# Altium PCB USB_Receiver.PcbDoc
Units mm, origin at the board's own origin, x right, y up, seen from the top; angles counter-clockwise.
Board outline 16.3 x 15.86 mm, 4 copper layers (Top Layer, Signal1, Signal2, Bottom Layer), stack 1.781 mm thick; 38 components, 31 nets, 141 pads, 47 vias.
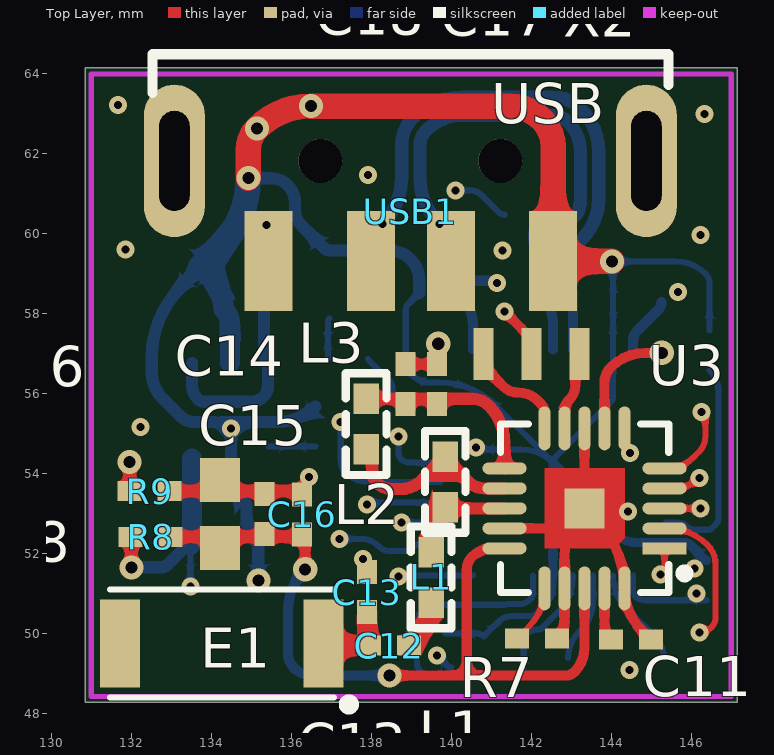
[diagram p0: Top Layer view]
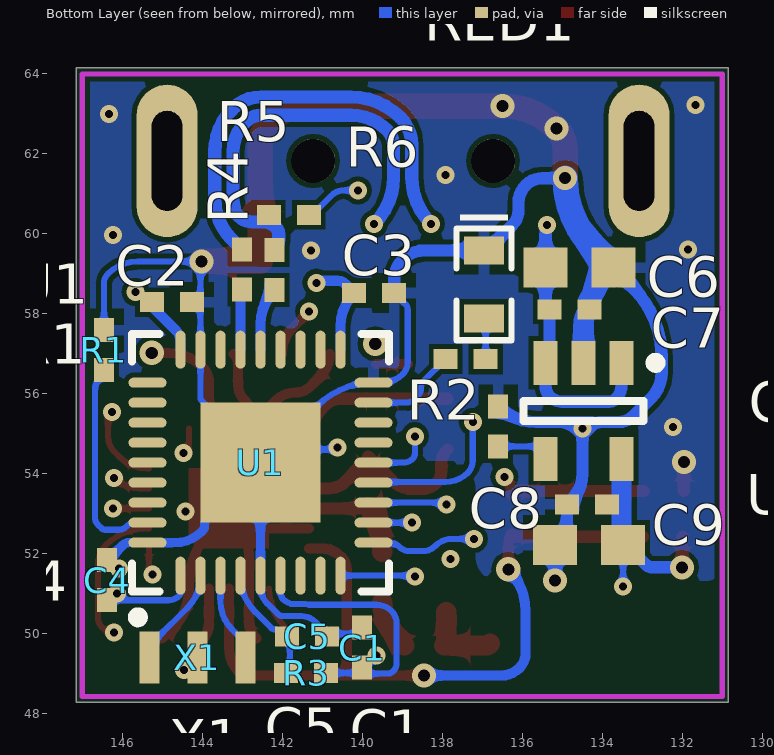
[diagram p1: Bottom Layer view, seen from below]
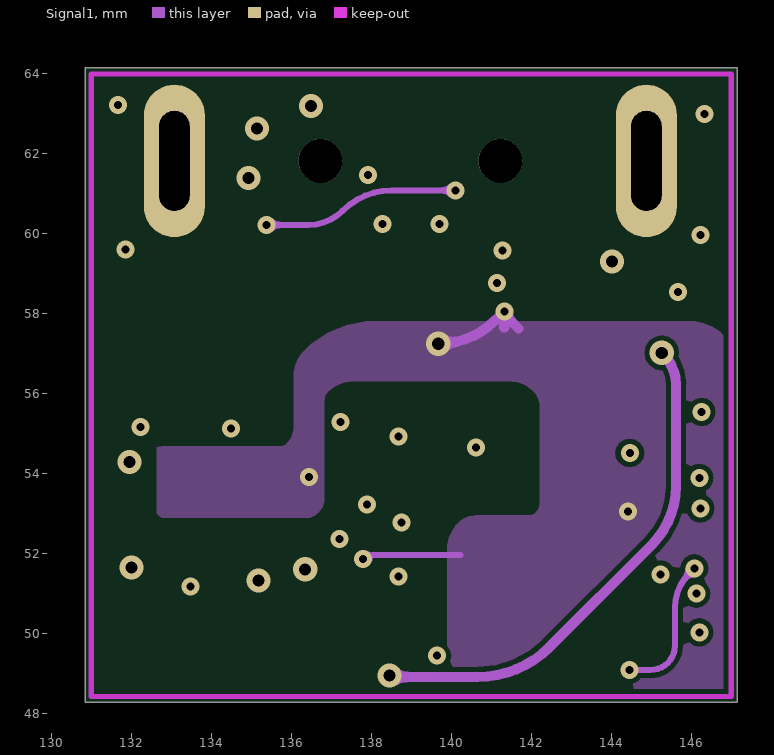
[diagram p2: Signal1]
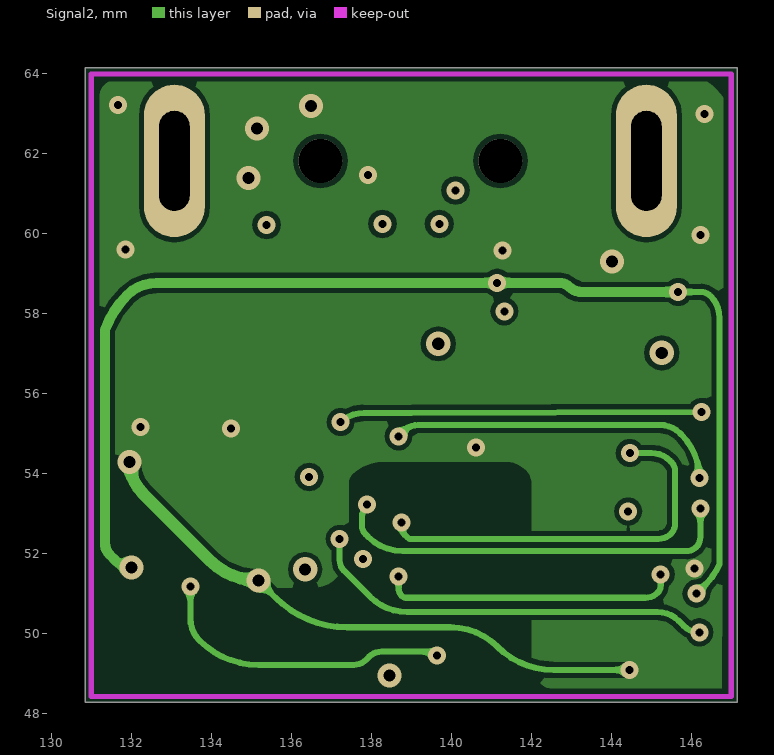
[diagram p3: Signal2]

## Layer stack, top to bottom
Top Solder: solder mask 0.0254, SM-001, Dk 4
Top Layer: signal copper 0.035
Dielectric 2: prepreg 0.0711, PP-006, Dk 4.1
Signal1: signal copper 0.035
Dielectric 1: core 1.4986, Core-043, Dk 4.3
Signal2: signal copper 0.035
Dielectric 3: prepreg 0.0711, PP-006, Dk 4.1
Bottom Layer: signal copper 0.035
Bottom Solder: solder mask 0.0254, SM-001, Dk 4

## Board outline
130.85,48.288 130.85,64.15 147.15,64.15 147.15,48.288

## Design rules (kind name [scope] priority, off if disabled: settings)
Clearance [All] p1: gap=0.127 ignorepadtopadclearanceinfootprint=FALSE
DiffPairsRouting DiffPair_DiffPairsRouting [InDifferentialPair ('USBIN')] p1: maxlimit=0.127 minlimit=0.127 mostfreqgap=0.127 toplayer_minwidth=0.33 toplayer_maxwidth=0.406 toplayer_prefwidth=0.33 midlayer1_minwidth=0.33 midlayer1_maxwidth=0.406 midlayer1_prefwidth=0.33 midlayer2_minwidth=0.33 midlayer2_maxwidth=0.406 midlayer2_prefwidth=0.33 bottomlayer_minwidth=0.33 bottomlayer_maxwidth=0.406 bottomlayer_prefwidth=0.33 maxuncoupledlength=12.7
MatchedLengths DiffPair_MatchedLengths [InDifferentialPair ('USBIN')] p1: tolerance=25.4 checknetsindiffpair=FALSE checkdiffpairvsdiffpair=TRUE checkxsignals=TRUE checkothers=TRUE
MatchedLengths [InDifferentialPair ('USB_MCU_TYPEC')] p2: tolerance=25.4 checknetsindiffpair=FALSE checkdiffpairvsdiffpair=TRUE checkxsignals=TRUE checkothers=TRUE
MinimumSolderMaskSliver [All] p1: minsoldermaskwidth=0.025
PolygonConnect [All] p1: thpad.connectstyle=Relief thpad.reliefconductorwidth=0.254 thpad.reliefentries=4 thpad.polygonreliefangle="90 Angle" thpad.airgapwidth=0.254 smdpad.connectstyle=Relief smdpad.reliefconductorwidth=0.254 smdpad.reliefentries=4 smdpad.polygonreliefangle="90 Angle" smdpad.airgapwidth=0.254 via.connectstyle=Direct via.reliefconductorwidth=0.254 via.reliefentries=4 via.polygonreliefangle="90 Angle" via.airgapwidth=0.254
RoutingVias [All] p1: holewidth=0.305 width=0.61 viastyle="Through Hole" minholewidth=0.305 minwidth=0.61 maxholewidth=0.635 maxwidth=1.27
SilkToSilkClearance [All] p1: silktosilkclearance=0.025
SilkToSolderMaskClearance [IsPad] p1: minsilkscreentomaskgap=0.025 clearancetoexposedcopper=TRUE
SolderMaskExpansion [All] p1: expansion=0.102 istentingtop=FALSE
Width [All] p1: maxlimit=1.016 minlimit=0.152 preferedwidth=0.152
26 further rules are at their usual default settings.

## Classes and differential pairs
component class POWER: C6 C7 C8 C9 C10 R4 R5 R6 U2 USB1
component class NRF24L01: C11 C12 C13 C14 C15 C16 C17 C18 E1 L1 L2 L3 R7 R8 R9 U3 X2
component class MCU: C1 C2 C3 C4 C5 R1 R2 R3 RED1 U1 X1
differential pair USBIN: +USBIN_P -USBIN_N
differential pair USB_MCU_TYPEC: +USB_MCU_TYPEC_P -USB_MCU_TYPEC_N

## Components (designator, comment, footprint, x,y, rotation, side; value= is the part's Value field where it differs from the comment)
C1 "104" Cap-0402-M 140.005,49.657 r270 bottom
C2 "104" Cap-0402-M 144.755,58.293 r0 bottom
C3 "104" Cap-0402-M 139.7,58.522 r0 bottom
C4 "104" Cap-0402-M 146.38,51.341 r270 bottom
C5 "104" Cap-0402-M 141.376,49.936 r0 bottom
C6 "10uF" Cap-0603-M 134.569,59.157 r0 bottom
C7 "104" Cap-0402-M 134.815,58.115 r0 bottom
C8 "104" Cap-0402-M 134.383,53.238 r180 bottom
C9 "10uF" Cap-0603-M 134.327,52.222 r180 bottom
C10 "10nF" Cap-0402-M 136.601,55.186 r270 bottom
C11 "33nF" CAP-0402-M 144.493,49.86 r180 top
C12 "1.5pF" Cap-0402-M 138.447,49.708 r180 top
C13 "1pF" Cap-0402-M 137.897,51.046 r270 top
C14 "10uF" Cap-0603-M 134.214,52.998 r270 top
C15 "10nF" CAP-0402-M 135.331,52.992 r270 top
C16 "1nF" CAP-0402-M 136.271,52.984 r270 top
C17 "4.7nF" Cap-0402-M 139.649,56.244 r270 top
C18 "2.2nF" Cap-0402-M 138.862,56.244 r270 top
E1 "ANT" AN2051-245 134.264,49.759 r180 top
L1 "3.9nH" L-0402 139.497,52.045 r270 top
L2 "8.2nH" L-0402 139.852,54.432 r270 top
L3 "2.7nH" L-0402 137.871,54.61 r90 top
R1 "10K" Res-0402-M 146.456,57.091 r90 bottom
R2 "4.7K" Res-0402-M 137.414,56.871 r0 bottom
R3 "10K" Res-0402-M 141.402,49.022 r180 bottom
R4 "22R" Res-0402-M 143.002,59.106 r270 bottom
R5 "22R" Res-0402-M 142.189,59.098 r270 bottom
R6 "1K5" Res-0402-M 141.834,60.477 r180 bottom
R7 "22K 1%" Res-0402-M 142.146,49.886 r180 top
R8 "0R" Res-0402-M 132.486,52.426 r0 top
R9 "0R" Res-0402-M 132.461,53.569 r0 top
RED1 "SYSTEM" LED_0603_R 136.957,58.737 r90 bottom
U1 "STM32F103T8U6" "STM-VFQFPN36_L _2" 142.545,54.28 r90 bottom locked
U2 "SPX3819" SOT23-5 134.468,55.575 r270 bottom
U3 "NRF24R01" "QFN20 4x4" 143.332,53.137 r180 top locked
USB1 "USB-A" USB_A/P_B 135.435,59.316 r180 top locked
X1 "XTAL-3P" "OSC 3213-3P" 144.12,49.403 r180 bottom
X2 "XTAL-3P" "OSC 3213-3P" 142.011,56.998 r180 top

## Footprints (in the part's own frame and the unit in brackets; to place one, negate y for a bottom-side part, rotate by r counter-clockwise, add the part's x,y. Pads: shape width x height; smd on the part's side, far side on the other; paste and mask are expansions set on the pad)
AN2051-245 [mm] "2.5G陶瓷天线"
  rect 1x2.2 smd: 0(2.54,0) 1(-2.54,0)
  silkscreen extent -3.3,-1.35 2.8,1.65, body extent -2.25,-1 2.25,1, height 0.88
Cap-0402-M [mm]
  rect 0.6x0.5 smd: 1(-0.5,0) 2(0.5,0)
  body extent -0.5,-0.25 0.5,0.25, height 0.5
CAP-0402-M [mm]
  rect 0.6x0.5 smd: 1(-0.5,0) 2(0.5,0)
  body extent -0.5,-0.25 0.5,0.25, height 0.5
Cap-0603-M [mm]
  rect 1.1x1 smd: 1(-0.85,0) 2(0.85,0)
  body extent -0.8,-0.4 0.8,0.4, height 0.6
L-0402 [mil] "小功率贴片电感"
  rect 30x25 smd: 1(0,0) 2(50,0)
  silkscreen extent -25,-20 75,20, body extent 5,-10 45,10, height 20
LED_0603_R [mm]
  rect 0.7x1 smd: 1(-0.85,0) 2(0.85,0)
  silkscreen extent -1.4,-0.69 1.75,0.69, body extent -0.8,-0.4 0.8,0.41, height 0.61
"OSC 3213-3P" [mm] "CSTCE16M0V53-R0"
  rect 0.5x1.3 smd: 1(-1.2,0) 2(0,0) 3(1.2,0)
  body extent -1.61,-0.76 1.61,0.76, height 0.91
"QFN20 4x4" [mm]
  rect 1.1x0.3 smd: 1(-2,1)
  oval 1.1x0.3 smd: 2(-2,0.5) 3(-2,0) 4(-2,-0.5) 5(-2,-1) 11(2,-1) 12(2,-0.5) 13(2,0) 14(2,0.5) 15(2,1)
  oval 0.3x1.1 smd: 6(-1,-2) 7(-0.5,-2) 8(0,-2) 9(0.5,-2) 10(1,-2) 16(1,2) 17(0.5,2) 18(0,2) 19(-0.5,2) 20(-1,2)
  rect 1x1 smd: 21(0,0)
  Top Layer region: 1,1 1,-1 -1,-1 -1,0.75 -0.75,1
  silkscreen extent -2.6,-2.11 2.11,2.11, body extent -2,-2.01 2.02,2.01, height 0.98
Res-0402-M [mm]
  rect 0.6x0.5 smd: 1(-0.5,0) 2(0.5,0)
  body extent -0.5,-0.25 0.5,0.25, height 0.38
SOT23-5 [mm]
  rect 1.1x0.6 smd: 1(-1.2,0.95) 2(-1.2,0) 3(-1.2,-0.95) 4(1.2,-0.95) 5(1.2,0.95)
  silkscreen extent -1.32,-1.5 0.25,1.92, body extent -1.4,-1.45 1.4,1.45, height 1.2
"STM-VFQFPN36_L _2" [mm] "QFN, 36-Leads, Body 6.13x6.13mm, Pitch 0.5mm, Thermal Pad 3x3mm, IPC High Density"
  oval 0.95x0.25 smd: 1(-2.825,2) 2(-2.825,1.5) 3(-2.825,1) 4(-2.825,0.5) 5(-2.825,0) 6(-2.825,-0.5) 7(-2.825,-1) 8(-2.825,-1.5) 9(-2.825,-2) 19(2.825,-2) 20(2.825,-1.5) 21(2.825,-1) 22(2.825,-0.5) 23(2.825,0) 24(2.825,0.5) 25(2.825,1) 26(2.825,1.5) 27(2.825,2)
  oval 0.25x0.95 smd: 10(-2,-2.825) 11(-1.5,-2.825) 12(-1,-2.825) 13(-0.5,-2.825) 14(0,-2.825) 15(0.5,-2.825) 16(1,-2.825) 17(1.5,-2.825) 18(2,-2.825) 28(2,2.825) 29(1.5,2.825) 30(1,2.825) 31(0.5,2.825) 32(0,2.825) 33(-0.5,2.825) 34(-1,2.825) 35(-1.5,2.825) 36(-2,2.825)
  rect 3x3 smd: 37(0,0)
  silkscreen extent -3.99,-3.21 3.21,3.21, body extent -3.07,-3.07 3.07,3.07, height 1
USB_A/P_B [mm]
  oval 1.524x3.81 hole 0.762 slot 2.5 at 90 deg: 0(-9.443,-2.508) 0(2.357,-2.508)
  round 1.1 hole 1.1 unplated: 0(-5.793,-2.508) 0(-1.293,-2.508)
  rect 1.2x2.5 smd: 1(0,0) 2(-2.556,0) 3(-4.556,0) 4(-7.112,0)
  silkscreen extent -9.99,-5.18 2.91,-4.21, body extent -9.91,-20.46 3.04,0.14, height 3.25

## Part data
C1 C2 C3 C4 C5 C6 C7 C8 C9 C10 C11 C12 C13 C14 C15 C16 C17 C18: library part CAP, "贴片陶瓷电容"
L1 L2 L3: library part INDUCTOR, "贴片电感"
R1 R2 R3 R4 R5 R6 R7 R8 R9: library part RES, "贴片电阻"
RED1: library part LED_SMD_RED, "发光二极管", Package=0603, SuppliersPartNumber=C2286, ComponentLink1Description=供应商链接, ComponentLink1URL=http://www.szlcsc.com/product/details_2659.html, Supplier=LC
U1: "ARM Cortex-M3 32-bit MCU, 64 KB Flash, 20 KB Internal RAM, 26 I/Os, 36-pin VFQFPN, -40 to 85 degC, Tray", I/Os (High Current)=26, Operating Frequency(F) (Processor speed) (MHz)=72, Supplier Part Number 1=497-11532-ND, Supply Voltage(Vcc) min (V)=2, A/D Converter="2x12-bit (10 Channel)", ComponentLink1Description="Manufacturer URL", ComponentLink1URL=http://www.st.com/web/en/home.html, ComponentLink2Description=Datasheet, ComponentLink2URL=http://www.st.com/st-web-ui/static/active/en/resource/technical/document/datasheet/CD00161566.pdf, ComponentLink3Description="Package Specification", ComponentLink3URL=http://www.st.com/st-web-ui/static/active/en/resource/technical/document/datasheet/CD00161561.pdf, Core="ARM Cortex-M3", DatasheetVersion="Rev. 16", FLASH Size (Prog) (kB)=64, Internal RAM Size (kB)=20, Mounting Technology="Surface Mount", PackageDescription="36-Pin Quad Flat No-Lead, 6 x 6 x 1.0 mm Body, 0.5 mm Pitch, Exposed Pad", PackageReference=VFQFPN36, PackageVersion="Rev. 16, 08/2013", Packing=Tray, PartNumber=STM32F103T8U6, Supplier 1=Digi-Key, Supplier 2=Farnell, Supplier 3=Newark, Supplier 4=Mouser, Supplier Part Number 2=1606329, Supplier Part Number 3=11N8298, Supplier Part Number 4=511-STM32F103T8U6
U3: "2.4G无线"
X1 X2: "3脚无源晶振带电容"
E1: PackageReference=R_1206, Published=12-August-2017, Publisher=mazhongwei

## Via types
v1: diameter 0.45, hole 0.2, Top Layer to Bottom Layer, tented both sides, 36 vias
v2: diameter 0.6, hole 0.3, Top Layer to Bottom Layer, tented both sides, 7 vias
v3: diameter 0.61, hole 0.305, Top Layer to Bottom Layer, tented both sides, 4 vias

## Nets (pads, with @x,y where several pads share a name; then routed paths per layer and width w, separated by ;. In a path a pad name is that pad's centre, name@x,y a point inside that pad or via, vN(x,y) a via of type N, cw(c..) or ccw(c..) an arc to the next point about the centre after c; other vN are vias at no path point)
3V3: C1.2 C2.2 C3.2 C4.2 C8.2 C9.2 R3.2 R8.1 U1.1 U1.6 U1.19 U1.27 U2.5 | length 56.5
  Top Layer w0.305: R8.1 cw(c131.944,52.384) 132.004,52.384 v2(132.004,51.664)
  Signal2 w0.152: v1(133.477,51.181) 133.477,50.387 ccw(c134.257,50.387) 133.706,49.835 ccw(c135.177,51.307) 135.177,49.225 137.566,49.225 ccw(c137.566,49.654) 137.87,49.351 137.947,49.428 cw(c138.254,49.122) 138.254,49.555 139.501,49.555 cw(c139.501,49.444) 139.58,49.523 v1(139.649,49.454) ; v1(145.669,58.547) 146.237,58.547 cw(c146.237,58.2) 146.482,58.445 cw(c145.936,57.9) 146.708,57.9 146.708,51.755 cw(c145.34,52.299) 146.381,51.258 v1(146.126,51.003)
  Signal2 w0.254: v2(132.004,51.664) cw(c132.004,52.215) 131.614,51.825 131.468,51.971 cw(c131.771,52.273) 131.343,52.273 131.343,57.599 cw(c133.619,56.754) 131.902,58.471 cw(c132.638,57.735) 132.638,58.776 v1(141.148,58.776) 142.706,58.776 cw(c142.706,58.429) 142.951,58.674 ccw(c143.258,58.981) 143.258,58.547 v1(145.669,58.547)
  Bottom Layer w0.152: v1(133.477,51.181) C9.2 ; v1(139.649,49.454) 139.905,49.198 ccw(c140.005,49.298) C1.2 ; R3.2@140.808,49.022 139.895,49.022 ccw(c139.895,48.962) 139.852,49.005 139.382,49.005 cw(c139.382,49.238) 139.217,49.073 cw(c139.401,49.257) 139.141,49.257 139.141,50.265 cw(c139.575,50.265) 139.268,50.571 cw(c139.643,50.196) 139.643,50.727 141.325,50.727 cw(c141.516,49.924) 141.516,50.749 141.779,50.749 ccw(c141.618,51.244) 141.986,50.876 ccw(c141.844,51.018) 142.045,51.018 U1.6 ; U1.1 144.545,51.03 ccw(c144.654,51.03) 144.577,50.952 ccw(c144.845,51.22) 144.845,50.841 C4.2
  Bottom Layer w0.254: U1.19 140.545,57.689 ccw(c139.368,57.689) C3.2 140.428,58.749 cw(c140.614,58.562) 140.614,58.826 141.025,58.826 cw(c141.025,58.653) v1(141.148,58.776) ; U1.27 144.545,57.321 cw(c144.914,57.321) 144.653,57.582 145.177,58.106 ccw(c144.99,58.293) C2.2
  Bottom Layer w0.305: v2(132.004,51.664) 132.734,51.664 ccw(c132.734,51.924) 132.918,51.74 133.347,52.169 cw(c133.477,52.038) C9.2
  Bottom Layer w0.508: C9.2 ccw(c133.379,52.32) 133.518,52.32 U2.5
5V: C6.2 C7.2 R6.2 U2.1 U2.3 USB1.1 | length 13.4
  Signal1 w0.152: v1(135.382,60.223) 136.429,60.223 ccw(c136.429,61.437) 137.287,60.579 cw(c138.513,59.353) 138.513,61.087 v1(140.106,61.087)
  Bottom Layer w0.152: v1(140.106,61.087) 140.46,61.087 cw(c140.46,60.653) 140.767,60.96 141.19,60.537 ccw(c141.334,60.681) R6.2
  Bottom Layer w0.305: U2.1 133.518,56.211 ccw(c133.986,56.211) 133.655,55.88 ccw(c133.839,56.064) 133.839,55.804 134.999,55.804 ccw(c134.999,56.237) 135.306,55.931 ccw(c135.036,56.201) 135.418,56.201 U2.3 cw(c135.665,57.022) 135.315,57.022 C7.2 ccw(c135.064,58.366) 135.419,58.366 C6.2 135.419,60.134 ccw(c135.292,60.134) v1(135.382,60.223)
GND: C1.1 C2.1 C3.1 C4.1 C5.1 C6.1 C7.1 C8.1 C9.1 C10.1 R1.2 R9.1 RED1.2 U1.5 U1.18 U1.26 U1.36 U1.37 U2.2 USB1.4 X1.2 | length 86.4
  Top Layer w0.305: R9.1 v2(131.961,54.297)
  Top Layer w0.635: v2(134.925,61.392) 134.925,62.106 cw(c135.679,62.106) v2(135.146,62.639) cw(c136.489,61.296) v2(136.489,63.195) 141.468,63.195 cw(c141.468,62.068) 142.265,62.865 cw(c141.585,62.184) 142.547,62.184 USB1.4 144.011,59.316 v2(144.018,59.309)
  Signal1 w0.152: v1(144.45,49.098) 144.986,49.098 ccw(c144.986,49.705) 145.415,49.276 ccw(c144.986,49.705) 145.593,49.705 145.593,50.648 cw(c146.819,50.648) 145.952,51.515 v1(146.075,51.638)
  Signal2 w0.152: v2(135.179,51.333) 135.603,50.909 ccw(c137.399,52.705) 137.399,50.165 139.983,50.165 cw(c139.983,48.517) 141.148,49.682 ccw(c142.558,51.093) 142.558,49.098 v1(144.45,49.098)
  Signal2 w0.305: v2(131.961,54.297) ccw(c133.065,54.297) 132.284,53.517 133.965,51.836 ccw(c135.179,53.05) v2(135.179,51.333)
  Bottom Layer w0.152: C3.1 138.917,58.239 ccw(c139.051,58.105) 138.862,58.105 138.862,56.796 ccw(c139.295,56.796) 138.989,56.49 ccw(c139.495,56.996) 139.495,56.28 U1.18 cw(c139.72,54.288) 141.128,55.696 U1.37 ; C1.1@139.852,50.005 140.653,50.005 cw(c140.653,49.772) 140.818,49.936 141.191,50.31 cw(c141.516,49.985) 141.516,50.444 141.986,50.444 ccw(c141.986,50.628) 142.116,50.498 142.367,50.749 ccw(c141.938,51.178) 142.545,51.178 U1.5 ; v1@140.589,54.61 141.748,54.61 cw(c141.748,53.483) U1.37 ; v2(144.018,59.309) v2@144.045,59.309 ; R1.2 146.456,58.759 ccw(c146.11,58.759) 146.355,59.004 ccw(c145.619,58.268) 145.619,59.309 v2@144.045,59.309 ; U1.37 cw(c142.729,54.28) 142.599,54.41 143.993,55.804 ccw(c143.867,55.93) 144.045,55.93 U1.26 v2@144.045,59.309
  Bottom Layer w0.229: U1.5 U1.37 143.816,53.008 cw(c143.513,52.705) 143.942,52.705 ccw(c144.126,52.705) 143.996,52.575 144.018,52.553 ccw(c144.677,53.211) 144.677,52.28 U1.36 145.835,52.28 cw(c145.835,52.084) 145.974,52.222 146.337,51.859 ccw(c146.38,51.903) C4.1
  Bottom Layer w0.305: C6.1 133.256,58.693 ccw(c135.052,56.897) 132.512,56.897 132.512,56.54 ccw(c133.432,56.54) 132.781,55.89 133.232,55.439 ccw(c133.579,55.786) 133.579,55.296 134.036,55.296 cw(c134.036,54.989) 134.253,55.206 v1@134.493,54.966 ; 134.253,55.296 v1@134.493,55.296 ; v2(134.925,61.392) 135.486,61.392 cw(c135.486,60.785) 135.915,61.214 cw(c135.486,60.785) 136.093,60.785 136.093,60.591 ccw(c136.614,60.591) 136.246,60.223 136.83,59.639 ccw(c136.957,59.766) RED1.2 138.441,59.587 cw(c138.441,58.812) 138.989,59.36 cw(c138.479,58.85) 139.2,58.85 C3.1 ; v2(135.179,51.333) 135.177,51.335 C9.1 cw(c135.886,52.931) 134.883,52.931 C8.1 134.756,53.366 cw(c135.39,54) 134.493,54 v1@134.493,54.966 ; C10.1 cw(c135.659,56.629) 135.659,55.296 135.076,55.296 ; v1@134.493,54.966 v1@134.493,55.296 ; v1@134.493,54.966 134.645,55.117 cw(c135.076,54.686) 135.076,55.296 ; v1@134.493,55.296 135.076,55.296
  Bottom Layer w0.508: C6.1 134,58.876 cw(c133.24,58.115) C7.1 cw(c133.947,57.747) 134.468,57.747 U2.2
  Bottom Layer w0.635: C6.1 134.197,59.634 ccw(c132.439,61.392) v2(134.925,61.392)
  other v1: 140.614,54.661 134.493,55.131 132.232,55.169 141.28,59.584 131.851,59.614 146.228,59.969 137.922,61.468 146.329,62.992 131.674,63.221
GPIO_CE_MCU_NRF: U1.9 U3.1 | length 10
  Top Layer w0.152: v1(145.237,51.486) ccw(c145.008,51.715) 145.332,51.715 U3.1
  Signal2 w0.152: v1(138.684,51.435) 138.684,51.136 ccw(c138.944,51.136) 138.76,50.952 ccw(c138.883,51.075) 138.883,50.902 144.854,50.902 ccw(c144.854,51.335) 145.161,51.029 ccw(c144.977,51.213) 145.237,51.213 v1(145.237,51.486)
  Bottom Layer w0.152: v1(138.684,51.435) cw(c138.732,51.387) 138.732,51.455 U1.9
GPIO_IRQ_NRF_MCU: U1.11 U3.6 | length 11.7
  Top Layer w0.152: U3.6 144.332,54.836 ccw(c144.777,54.836) v1(144.462,54.521)
  Signal2 w0.152: v1@138.702,52.838 v1(138.76,52.78) 138.76,52.66 ccw(c139.02,52.66) 138.836,52.476 ccw(c139.511,53.151) 138.956,52.375 145.185,52.375 ccw(c145.185,52.808) 145.491,52.502 ccw(c145.246,52.747) 145.593,52.747 145.593,54.077 ccw(c145.286,54.077) 145.503,54.293 145.466,54.331 ccw(c145.006,53.871) 145.006,54.521 v1(144.462,54.521)
  Bottom Layer w0.152: v1(138.76,52.78) U1.11
GPIO_MCU_LED: R2.2 U1.17 | length 2.4
  Bottom Layer w0.152: R2.2 138.447,56.337 cw(c138.244,56.134) 138.532,56.134 ccw(c138.777,56.134) 138.603,55.961 138.709,55.855 ccw(c138.89,56.035) 138.89,55.78 U1.17
NetC10_2: C10.2 U2.4 | length 1.2
  Bottom Layer w0.152: U2.4@135.433,54.686 C10.2
NetC11_2: C11.2 U3.19 | length 1.3
  Top Layer w0.254: U3.19 143.832,50.247 ccw(c144.38,50.247) C11.2
NetC12_1: C12.1 L1.2 | length 1.2
  Top Layer w0.508: C12.1 139.131,49.891 ccw(c138.248,50.775) L1.2
NetC12_2: C12.2 C13.2 E1.1 | length 2
  Top Layer w0.508: E1.1 ccw(c136.927,49.881) 136.927,49.708 C12.2 cw(c138.07,49.83) 137.897,49.83 C13.2
NetC17_2: C17.2 C18.2 L3.2 U3.11 | length 4.8
  Top Layer w0.305: L3.2 138.862,55.88 139.649,55.88 140.515,55.88 cw(c140.515,55.273) 140.945,55.702 cw(c140.009,54.766) 141.332,54.766 U3.11
NetL1_1: L1.1 L2.2 U3.13 | length 2.7
  Top Layer w0.305: L2.2 ccw(c139.914,53.224) 139.914,53.137 U3.13
  Top Layer w0.508: L1.1 139.497,52.304 cw(c140.711,52.304) L2.2
NetL2_1: L2.1 L3.1 U3.12 | length 6
  Top Layer w0.305: L3.1 cw(c137.503,54.242) 138.024,54.242 138.024,54.051 ccw(c138.392,54.051) 138.131,53.791 138.151,53.772 ccw(c138.519,54.14) 138.519,53.619 138.735,53.619 ccw(c138.735,54.355) 139.255,53.835 ; U3.12 140.824,53.637 cw(c140.824,54.184) 140.437,53.797 ; 139.256,53.835 cw(c139.532,53.558) 139.532,53.95 140.069,53.95 cw(c140.069,53.429) 140.437,53.797 ; 139.256,53.835 L2.1 ccw(c139.975,54.432) 139.888,54.345 140.437,53.797
NetR1_1: R1.1 U1.35 | length 5.3
  Bottom Layer w0.152: U1.35 145.656,52.78 cw(c145.656,52.438) 145.898,52.68 ccw(c146.082,52.864) 146.082,52.603 146.431,52.603 ccw(c146.431,52.726) 146.518,52.639 146.609,52.73 ccw(c146.425,52.914) 146.685,52.914 146.685,56.039 ccw(c145.905,56.039) R1.1
NetR2_1: R2.1 RED1.1 | length 1
  Bottom Layer w0.152: R2.1 136.914,57.783 cw(c137.06,57.783) RED1.1
NetR7_2: R7.2 U3.16 | length 1.5
  Top Layer w0.152: R7.2 141.932,50.172 ccw(c140.967,51.137) U3.16
NetU3_9: U3.9 X2.1 | length 2
  Top Layer w0.254: U3.9 142.832,55.567 cw(c143.238,55.567) 142.951,55.855 ccw(c142.583,56.223) 143.104,56.223 143.104,56.737 cw(c143.472,56.737) X2.1
NetU3_10: U3.10 X2.3 | length 2.7
  Top Layer w0.254: X2.3 ccw(c141.594,56.998) 141.041,56.444 141.3,56.185 ccw(c141.668,56.553) 141.668,56.032 141.681,56.032 cw(c141.681,55.358) 142.158,55.835 142.24,55.753 cw(c142.017,55.53) 142.332,55.53 U3.10
NRST_MCU_KEY: C5.2 R3.1 U1.4 | length 3
  Bottom Layer w0.152: R3.1@141.808,49.022 141.808,49.927 141.818,49.936 141.858,49.977 cw(c142.189,49.646) 142.189,50.114 ccw(c142.189,50.237) 142.276,50.15 142.666,50.54 ccw(c141.751,51.455) U1.4
OSC_MCU_XTAL: U1.3 X1.3 | length 2.2
  Bottom Layer w0.152: X1.3 cw(c143.824,49.403) 143.185,50.043 143.256,50.114 ccw(c142.559,50.811) 143.545,50.811 U1.3
OSC_XTAL_MCU: U1.2 X1.1 | length 2.5
  Bottom Layer w0.152: U1.2 144.045,51.452 ccw(c145.193,51.452) 144.381,50.64 145.109,49.913 cw(c144.599,49.403) X1.1
RF_3V3: C14.2 C15.2 C16.2 R8.2 U3.7 U3.15 U3.18 | length 35.8
  Top Layer w0.254: C16.2 cw(c136.087,52.301) 136.347,52.301 v3(136.347,51.613) ; v3(138.455,48.959) 140.386,48.959 ; U3.15 141.042,52.137 ccw(c141.042,51.388) 140.513,51.918 ccw(c140.819,51.611) 140.386,51.611 140.386,48.959 ; U3.18 143.332,49.661 cw(c142.465,49.661) 143.078,49.047 cw(c142.864,49.262) 142.864,48.959 140.386,48.959 ; U3.7 143.832,56.28 cw(c144.38,56.28) 143.993,56.667 cw(c144.851,55.809) 144.851,57.023 v3(145.263,57.023)
  Top Layer w0.305: R8.2 136.129,52.426 ccw(c136.129,52.626) C16.2
  Signal1 w0.254: v3(138.455,48.959) 138.455,48.92 140.654,48.92 ccw(c140.654,51.46) 142.451,49.664 145.009,52.222 ccw(c143.537,53.694) 145.618,53.694 145.618,56.236 ccw(c144.576,56.236) 145.313,56.973 v3(145.263,57.023)
  Bottom Layer w0.254: v3(136.347,51.613) ccw(c137.39,50.57) 135.915,50.57 135.915,49.517 ccw(c136.436,49.517) 136.068,49.149 ccw(c136.528,49.609) 136.528,48.959 v3(138.455,48.959)
RF_GND: C11.1 C13.1 C14.1 C15.1 C16.1 C17.1 C18.1 R7.1 R9.2 U3.8 U3.14 U3.17 U3.20 U3.21 X2.2 | length 21.5
  Top Layer w0.254: C16.1 136.271,53.495 cw(c136.878,53.495) v1(136.449,53.924) ; C18.1 C17.1 ; v1(141.326,58.064) 141.742,57.648 cw(c141.092,56.998) X2.2 ; U3.14 142.748,52.637 cw(c142.748,52.349) 142.95,52.554 ; R7.1 ccw(c142.198,50.334) 142.832,50.334 U3.17 142.832,51.93 cw(c144.539,51.93) 142.95,52.554 ; 142.951,52.553 ccw(c142.748,52.349) 142.95,52.554 ; 143.332,53.746 U3.8 ; C11.1@145.011,49.888 cw(c145.82,51.137) U3.20 ccw(c141.918,51.137) 143.625,52.844 U3.21 ccw(c144.539,51.93) 142.95,52.554
  Top Layer w0.305: R9.2 136.094,53.569 cw(c136.094,53.318) C16.1@136.271,53.495
  Signal1 w0.152: v1(137.795,51.867) cw(c138.04,51.622) 138.04,51.968 140.233,51.968
  Signal1 w0.254: v3(139.675,57.252) ccw(c139.675,59.275) 141.105,57.844 v1(141.326,58.064) ; 141.326,57.658 v1(141.326,58.064) ; 141.681,57.633 141.379,57.934 cw(c141.51,58.064) v1(141.326,58.064)
  other v1: 144.424,53.061
SPI_CSN_MCU_NRF: U1.10 U3.2 | length 16.6
  Top Layer w0.152: U3.2 145.405,52.637 cw(c145.405,51.222) 146.406,52.222 cw(c145.915,51.732) 146.609,51.732 146.609,50.41 cw(c146.262,50.41) 146.507,50.165 146.506,50.164 cw(c146.202,50.467) v1(146.202,50.038) 146.11,50.038 v1@146.101,50.047
  Signal2 w0.152: v1(137.211,52.375) 137.211,51.833 ccw(c137.558,51.833) 137.312,51.587 137.97,50.93 ccw(c138.897,51.857) 138.897,50.546 145.157,50.546 cw(c145.157,49.801) 145.684,50.328 145.812,50.2 ccw(c146.202,50.59) v1(146.202,50.038)
  Bottom Layer w0.152: v1(137.211,52.375) 137.747,52.375 cw(c137.747,51.768) 138.176,52.197 138.177,52.196 ccw(c138.481,52.499) 138.481,52.07 138.82,52.07 ccw(c138.82,52.417) 139.065,52.172 cw(c139.326,51.91) 139.326,52.28 U1.10
SPI_MISO_NRF_MCU: U1.13 U3.5 | length 15
  Top Layer w0.152: U3.5 145.398,54.137 ccw(c145.398,55.059) 146.05,54.407 146.193,54.55 ccw(c145.803,54.94) 146.355,54.94 146.355,55.407 ccw(c146.202,55.407) v1(146.256,55.55)
  Signal2 w0.152: v1@137.279,55.339 v1(137.236,55.296) 137.216,55.275 cw(c137.817,54.674) 137.817,55.524 138.999,55.524 v1(146.256,55.55)
  Bottom Layer w0.152: v1(137.236,55.296) 137.236,54.332 ccw(c137.67,54.332) 137.363,54.026 ccw(c137.915,54.578) 137.915,53.797 139.702,53.797 U1.13
SPI_MOSI_MCU_NRF: U1.14 U3.4 | length 11
  Top Layer w0.152: U3.4 145.57,53.637 ccw(c145.57,54.531) v1(146.202,53.899)
  Signal2 w0.152: v1(138.684,54.94) 138.82,55.076 cw(c139.167,54.729) 139.167,55.22 140.106,55.223 145.22,55.223 cw(c145.22,54.516) 145.72,55.016 145.753,54.983 cw(c144.669,53.899) v1(146.202,53.899)
  Bottom Layer w0.152: v1(138.684,54.94) 138.684,54.504 ccw(c138.857,54.504) 138.735,54.381 ccw(c138.98,54.627) 138.98,54.28 U1.14 U1.14@139.771,54.28
SPI_SCK_MCU_NRF: U1.12 U3.3 | length 13.3
  Top Layer w0.152: U3.3 146.11,53.137 cw(c146.11,52.79) 146.355,53.035 146.253,53.137 v1(146.228,53.137)
  Signal2 w0.152: v1(137.897,53.238) ccw(c138.203,52.932) 137.77,52.932 137.77,52.705 ccw(c138.076,52.705) 137.859,52.488 137.922,52.426 ccw(c138.78,53.284) 138.78,52.07 145.881,52.07 ccw(c145.881,52.417) 146.126,52.172 ccw(c145.881,52.417) 146.228,52.417 v1(146.228,53.137)
  Bottom Layer w0.152: v1(137.897,53.238) cw(c137.997,53.138) 137.997,53.28 U1.12
USB_MCU_TYPEC_N: R5.2 U1.23 | length 1.6
  Bottom Layer w0.254: R5.2 cw(c141.331,57.739) 142.545,57.739 U1.23
USB_MCU_TYPEC_P: R4.2 U1.24 | length 1.5
  Bottom Layer w0.254: R4.2 143.045,58.563 U1.24
USBIN_N: R5.1 R6.1 USB1.3 | length 10.3
  Bottom Layer w0.33: v1(139.7,60.249) cw(c140.865,61.414) 139.217,61.414 139.217,62.218 cw(c139.738,62.218) 139.37,62.586 cw(c140.29,61.666) 140.29,62.967 142.532,62.967 cw(c142.532,62.446) 142.9,62.814 142.925,62.789 cw(c142.188,62.052) 143.231,62.052 143.231,60.884 cw(c142.258,60.884) 143.157,60.512 143.083,60.438 cw(c142.748,60.773) 142.748,60.3 142.47,60.3 ccw(c142.47,59.866) 142.164,60.173 ccw(c142.348,59.989) 142.088,59.989 142.088,59.843 ccw(c142.434,59.843) R5.1
USBIN_P: R4.1 USB1.2 | length 11.1
  Bottom Layer w0.33: v1(138.278,60.249) ccw(c137.112,61.414) 138.76,61.414 138.76,62.219 cw(c139.734,62.219) 139.045,62.908 139.047,62.91 cw(c140.288,61.669) 140.288,63.424 142.534,63.424 cw(c142.534,62.451) 143.222,63.139 143.249,63.112 cw(c142.19,62.053) 143.688,62.053 143.688,60.884 cw(c142.258,60.884) 143.269,59.873 R4.1
pads on no net: E1.0 U1.7 U1.8 U1.15 U1.16 U1.20 U1.21 U1.22 U1.25 U1.28 U1.29 U1.30 U1.31 U1.32 U1.33 U1.34 USB1.0

## Polygon pours and split planes (outlines as drawn)
no net on Top Layer "NONET_L01_P005" (solid, pour order 5): 147,64
RF_GND on Signal1 "RF_GND_L02_P000" (solid, remove dead copper, pour order 0): 147,48.438 ccw(c146.939,48.377) 146.938,48.463 140.233,48.463 cw(c140.233,48.708) 140.06,48.535 139.954,48.641 cw(c140.077,48.764) 139.903,48.764 139.903,52.107 cw(c140.857,52.107) 140.183,52.781 cw(c140.612,52.352) 140.612,52.959 141.929,52.959 ccw(c141.929,53.219) 142.113,53.035 ccw(c141.868,53.28) 142.215,53.28 142.215,55.69 ccw(c141.695,55.69) 142.062,56.058 ccw(c141.449,55.445) 141.449,56.312 137.558,56.312 ccw(c137.558,55.405) 136.917,56.046 ccw(c137.126,55.836) 136.83,55.836 136.83,53.391 cw(c136.34,53.391) 136.686,53.044 136.601,52.959 cw(c136.479,53.081) 136.479,52.908 132.74,52.908 cw(c132.69,54.523) 132.639,52.908 132.639,54.661 cw(c132.957,53.397) 132.766,54.686 135.706,54.686 ccw(c135.706,54.946) 135.89,54.762 ccw(c135.461,55.192) 136.068,55.192 136.068,56.461 cw(c136.935,56.461) 136.322,57.074 cw(c138.105,55.29) 138.106,57.813 145.984,57.813 cw(c145.984,56.678) 146.787,57.48 cw(c146.236,56.929) 147.015,56.928 147.015,56.871
GND on Signal2 "GND_L03_P004" (solid, remove dead copper, pour order 4): 146.761,48.641 142.494,48.641 cw(c142.494,49.009) 142.234,48.749 142.088,48.895 cw(c142.272,49.079) 142.011,49.079 142.011,53.77 ccw(c141.578,53.77) 141.884,54.077 ccw(c141.333,53.525) 141.333,54.305 138.313,54.305 ccw(c138.313,53.178) 137.516,53.975 ccw(c137.7,53.791) 137.439,53.791 137.439,52.181 cw(c136.312,52.181) 137.109,51.384 cw(c136.557,51.936) 136.557,51.156 131.851,51.156 cw(c131.851,51.707) 131.461,51.317 131.293,51.486 cw(c131.495,51.688) 131.209,51.688 131.209,63.448 cw(c131.562,63.448) 131.312,63.698 131.343,63.729 cw(c131.711,63.361) 131.711,63.881 146.103,63.881 cw(c146.103,63.274) 146.533,63.703 146.701,63.535 cw(c146.311,63.144) 146.863,63.144
GND on Bottom Layer "GND_L04_P006" (solid, pour order 6): 147,64 131,64 131,51.809 ccw(c131.565,51.809) 131.166,51.41 ccw(c131.35,51.594) 131.35,51.333 136.65,51.333 ccw(c136.65,51.767) 136.957,51.46 ccw(c136.466,51.951) 137.16,51.951 137.16,53.67 cw(c137.405,53.67) 137.232,53.844 137.668,54.28 cw(c137.791,54.157) 137.791,54.331 145.657,54.331 ccw(c145.657,55.892) 146.761,54.788

## Keep-outs
Keep-Out Layer:
  lines w0.127: 131,48.438 147,48.438 147,64 131,64 131,48.438

## Silkscreen, mask and mechanical layers (free items; w line width, h text height)
Mechanical 1:
  the board outline again, w0.127

## Text inside footprints (layer, text, board x,y; h text height)
USB1: Top Overlay "USB" at 140.995,62.763 h1